# Altium PCB KillAutoSystemPCB.PcbDoc
Units mil, origin at the board's own origin, x right, y up, seen from the top; angles counter-clockwise.
Board outline 1675 x 2590 mil, 2 copper layers (Top Layer, Bottom Layer); 20 components, 15 nets, 82 pads, 2 vias.
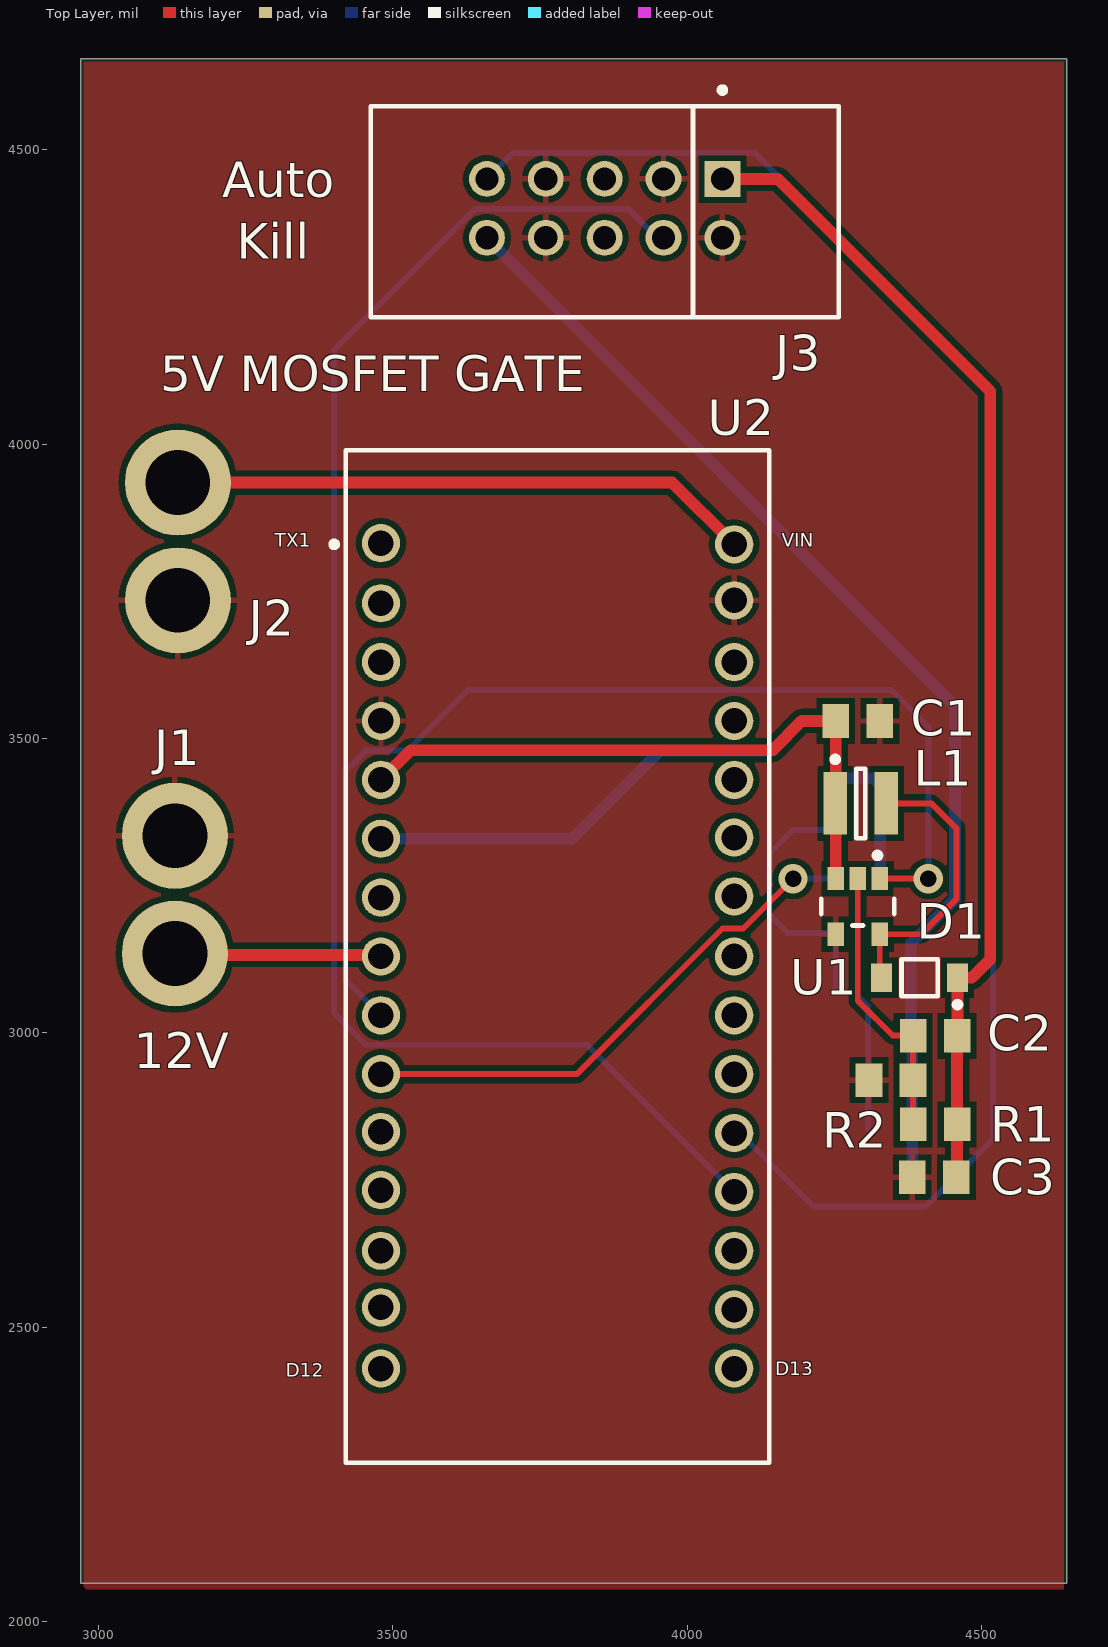
[diagram p0: Top Layer view]
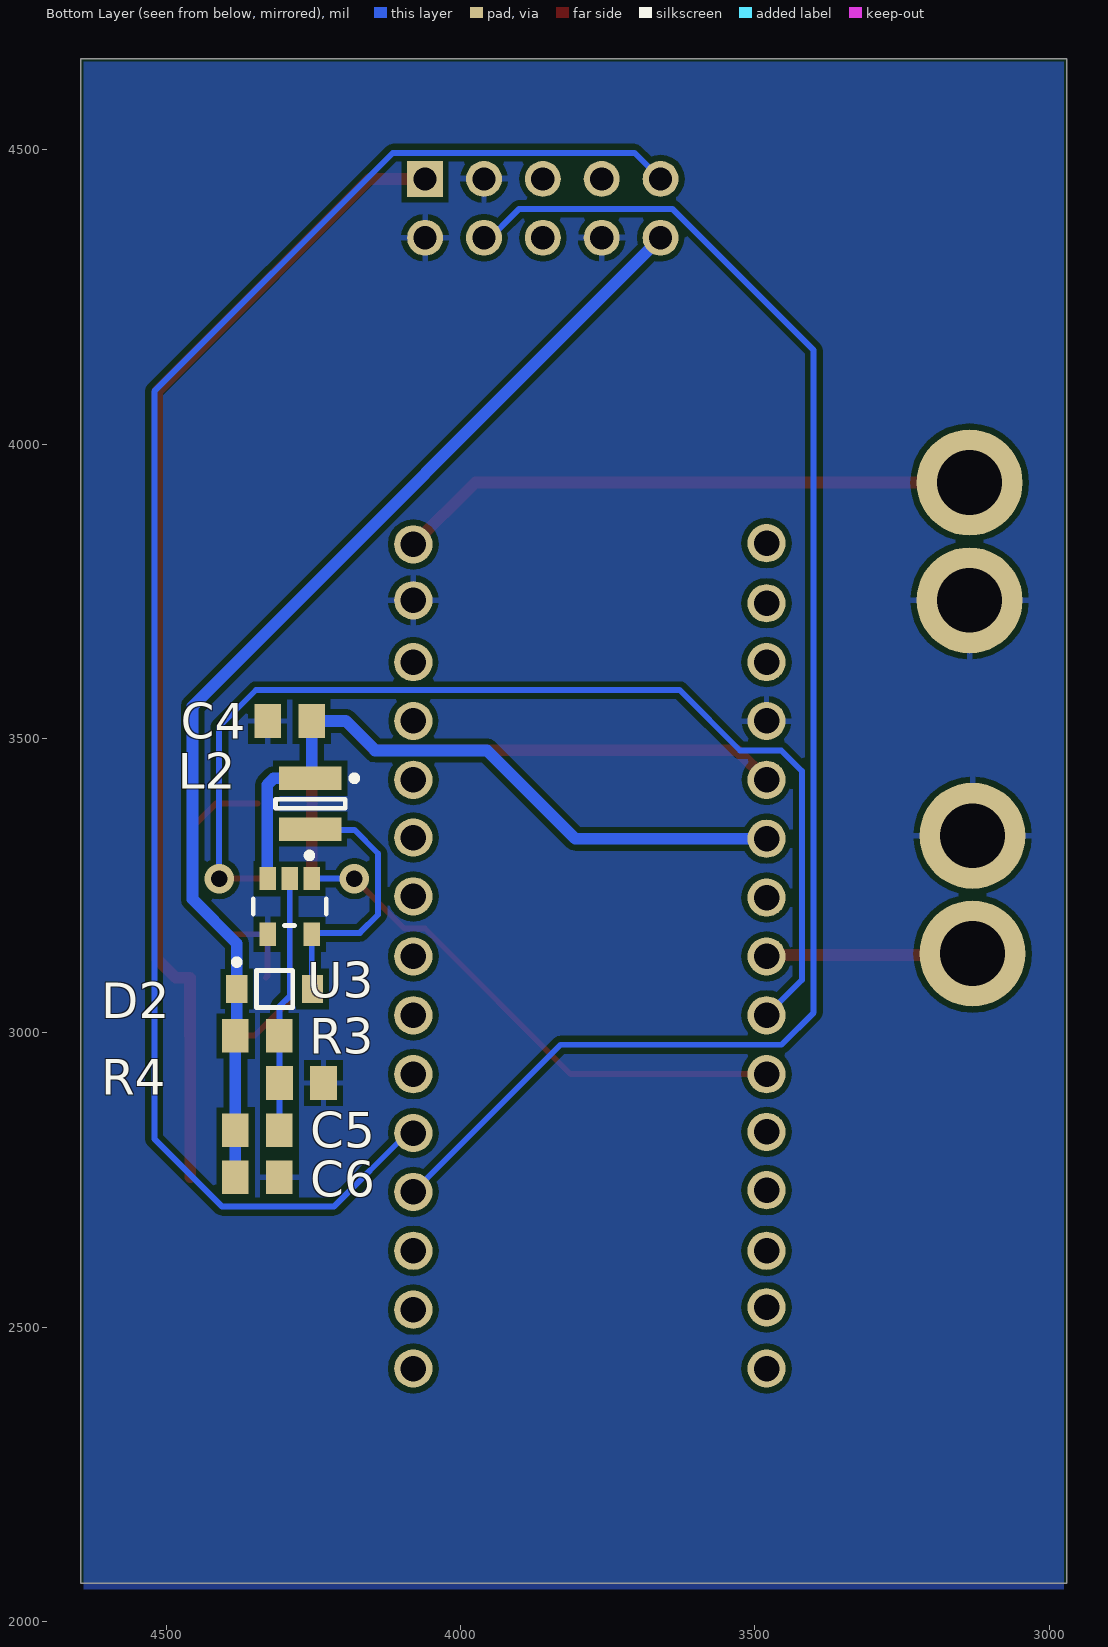
[diagram p1: Bottom Layer view, seen from below]
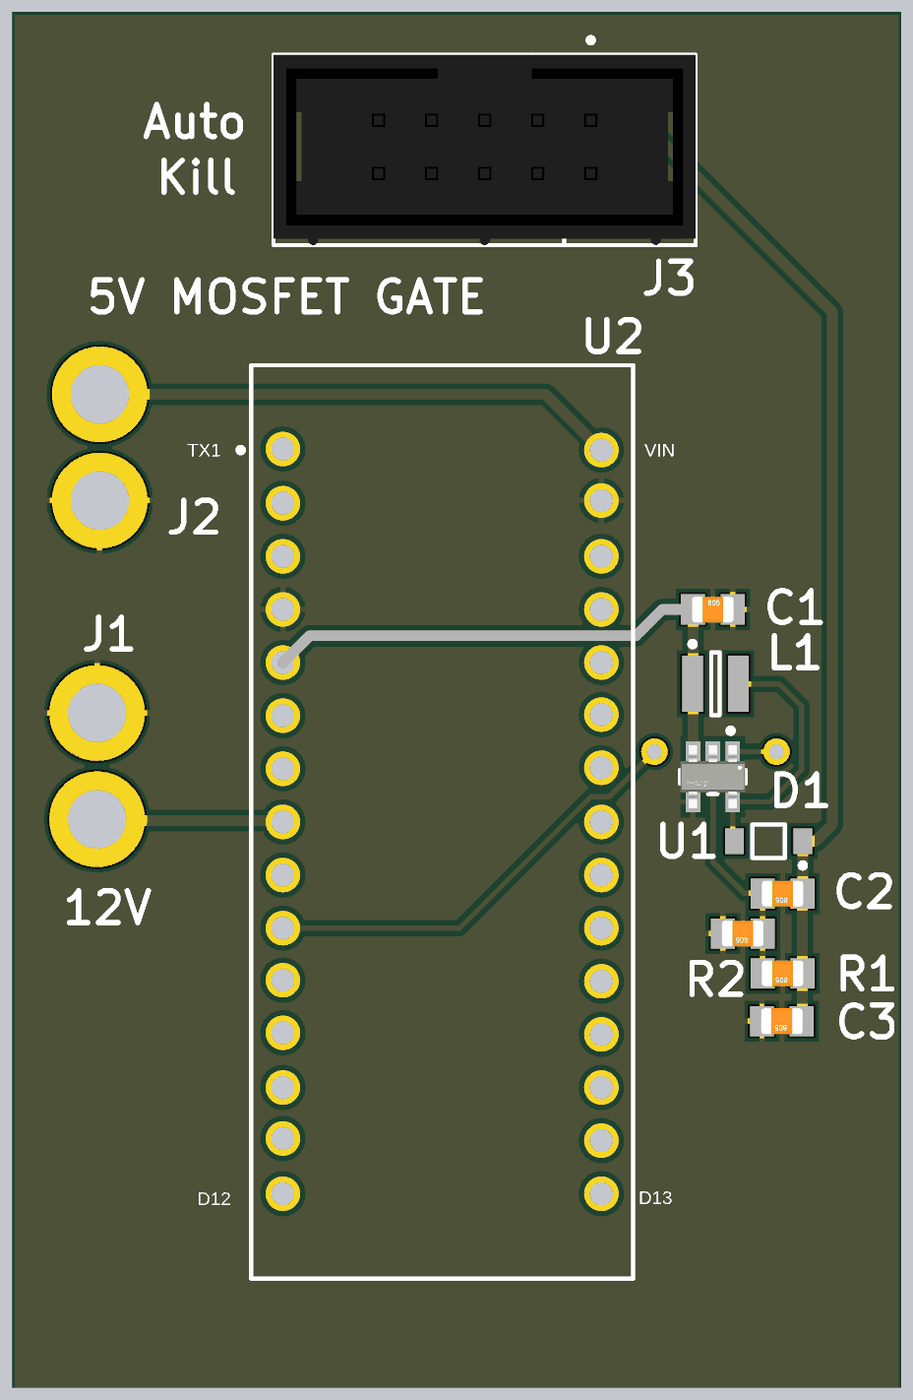
[diagram p2: 3D render of the assembled board from above, using the file's embedded part models]
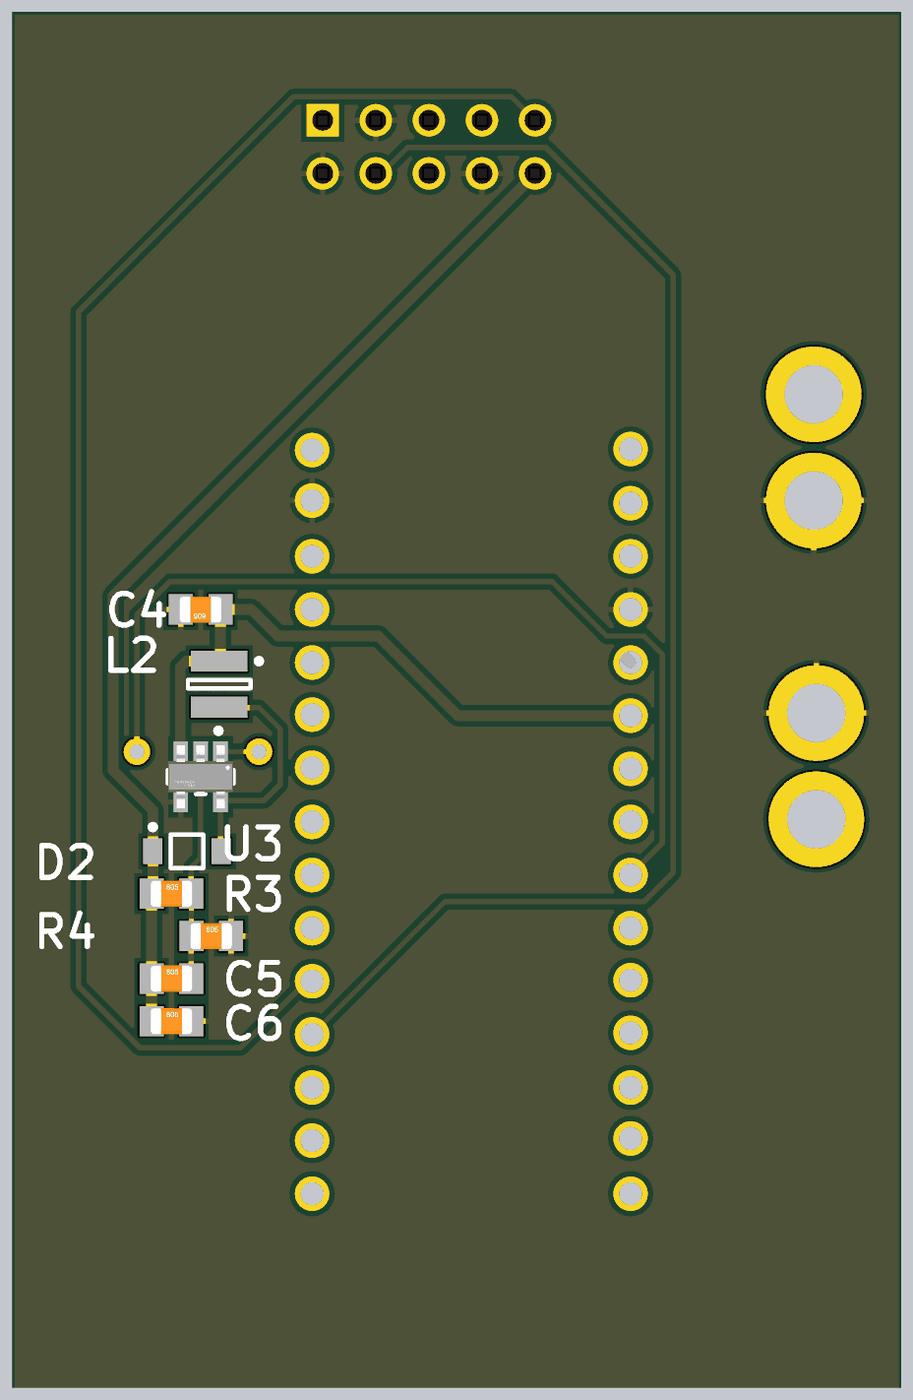
[diagram p3: 3D render of the assembled board from below, using the file's embedded part models]

## Layer stack, top to bottom
Top Solder: solder mask 0.4, Solder Resist, Dk 3.5
Top Layer: signal copper 1.4
Dielectric 1: dielectric 12.6, FR-4, Dk 4.8
Bottom Layer: signal copper 1.4
Bottom Solder: solder mask 0.4, Solder Resist, Dk 3.5

## Board outline
2970,2065 4645,2065 4645,4655 2970,4655

## Design rules (kind name [scope] priority, off if disabled: settings)
Clearance [All] p1: gap=10 ignorepadtopadclearanceinfootprint=FALSE except(0: Arc-Hole Track-Hole SMDPad-Hole THPad-Hole Via-Hole Fill-Hole Poly-Hole Region-Hole Text-Hole; 5: Arc-THPad Track-THPad; 8: SMDPad-SMDPad)
PolygonConnect [All] p1: connectstyle=Relief reliefconductorwidth=10 reliefentries=4 polygonreliefangle="90 Angle" airgapwidth=10
RoutingVias [All] p1: holewidth=28 width=50 viastyle="Through Hole" minholewidth=28 minwidth=50 maxholewidth=28 maxwidth=50
SolderMaskExpansion [All] p1: expansion=4
Width [All] p1: maxlimit=30 minlimit=10 preferedwidth=10
30 further rules are at their usual default settings.

## Components (designator, comment, footprint, x,y, rotation, side; value= is the part's Value field where it differs from the comment)
C1 "Ceramic Capacitor" "Component 0805" 4290,3530 r0 top
C2 "Ceramic Capacitor" "Component 0805" 4421.37,2995 r180 top
C3 "Ceramic Capacitor" "Component 0805" 4420,2755 r180 top
C4 "Ceramic Capacitor" "Component 0805" 4290,3530 r0 bottom
C5 "Ceramic Capacitor" "Component 0805" 4345,2835 r180 bottom
C6 "Ceramic Capacitor" "Component 0805" 4345,2755 r180 bottom
D1 "MBR0520LT1" ONSC-SOD-123-2-425-04_V 4395,3093.77 r180 top
D2 "MBR0520LT1" ONSC-SOD-123-2-425-04_V 4315.63,3074.68 r180 bottom
J1 "XT30" "Connector, XT30" 3130,3135 r180 top
J2 "XT30" "Connector, XT30" 3135,3935 r0 top
J3 "Conn_Sullins_Headers_SBH11-PBPC-D05-ST-BK_eec" Sullins_Headers_SBH11-PBPC-D05-ST-BK_0 3860,4395 r270 top
L1 "SRN3015-470M" BOUR-SRN3015-2_V 4295,3390 r0 top
L2 "SRN3015-470M" BOUR-SRN3015-2_V 4255,3389.38 r270 bottom
R1 "Resistor" "Component 0805" 4421.37,2844.81 r180 top
R2 "Resistor" "Component 0805" 4346.37,2919.9 r180 top
R3 "Resistor" "Component 0805" 4345,2995 r180 bottom
R4 "Resistor" "Component 0805" 4270,2915 r180 bottom
U1 "NCP1403SNT1G" ON_Semi_483_0 4290,3215 r180 top
U2 "Arduino_Nano_3.0" Arduino_Arduino_Nano_3.0_0 3780,3130 r0 top
U3 "NCP1403SNT1G" ON_Semi_483_0 4290,3215 r0 bottom

## Footprints (in the part's own frame and the unit in brackets; to place one, negate y for a bottom-side part, rotate by r counter-clockwise, add the part's x,y. Pads: shape width x height; smd on the part's side, far side on the other; paste and mask are expansions set on the pad)
Arduino_Arduino_Nano_3.0_0 [mm]
  round 1.65 hole 1.1 paste-1000 mask+0: 1(-7.62,17.831) 2(-7.62,15.24) 3(-7.62,12.7) 4(-7.62,10.16) 5(-7.62,7.62) 6(-7.62,5.08) 7(-7.62,2.54) 8(-7.62,0) 9(-7.62,-2.54) 10(-7.62,-5.08) 11(-7.62,-7.569) 12(-7.62,-10.085) 13(-7.62,-12.7) 14(-7.62,-15.138) 15(-7.62,-17.78) 16(7.62,-17.78) 17(7.62,-15.24) 18(7.62,-12.7) 19(7.62,-10.16) 20(7.62,-7.62) 21(7.62,-5.08) 22(7.62,-2.54) 23(7.62,0) 24(7.62,2.591) 25(7.62,5.131) 26(7.62,7.62) 27(7.62,10.16) 28(7.62,12.7) 29(7.62,15.367) 30(7.62,17.78)
  silkscreen extent -9.76,-21.84 9.14,21.84
BOUR-SRN3015-2_V [mm] "SMD, 2-Leads, Body 3x3mm, Height 1.5mm"
  rect 1x2.7 smd: 1(-1.1,0) 2(1.1,0)
  silkscreen extent -1.22,-1.5 0.2,2.02, body extent -1.5,-1.5 1.5,1.5, height 1.5
"Component 0805" [mm] "Chip Capacitor; Body 2.0 x 1.2 mm (LxW typ)"
  rect 1.15x1.45 smd: 1(-0.95,0) 2(0.95,0)
  body extent -1,-0.62 1,0.63, height 0.78
"Connector, XT30" [mil]
  round 180 hole 110: 1(0,0) 2(0,-200)
ON_Semi_483_0 [mm]
  rect 0.7x1 smd paste+0 mask+0: 1(-0.95,-1.2) 2(0,-1.2) 3(0.95,-1.2) 4(0.95,1.2) 5(-0.95,1.2)
  silkscreen extent -1.58,-2.32 1.58,0.82, body extent -1.83,-1.8 1.83,1.8, height 0.25
ONSC-SOD-123-2-425-04_V [mm] "SOD, 2-Leads, Body 2.69x1.6mm"
  rect 0.91x1.22 smd: 1(-1.635,0) 2(1.635,0)
  silkscreen extent -1.76,-0.8 0.78,1.28, body extent -1.35,-0.8 1.35,0.8, height 1.35
Sullins_Headers_SBH11-PBPC-D05-ST-BK_0 [mm]
  rect 1.55x1.55 hole 1 paste-1000 mask+0: 1(-1.42,5.08)
  round 1.55 hole 1 paste-1000 mask+0: 2(1.12,5.08) 3(-1.42,2.54) 4(1.12,2.54) 5(-1.42,0) 6(1.12,0) 7(-1.42,-2.54) 8(1.12,-2.54) 9(-1.42,-5.08) 10(1.12,-5.08)
  silkscreen extent -5.38,-10.1 4.55,10.1, body extent -4.8,-10.3 4.8,10.3, height 0.25

## Part data
C1 C4: library part "Capacitor, Ceramic", "*", Capacitance=10uF, Tolerance=10%, Voltage=50V
C2 C5: library part "Capacitor, Ceramic", "*", Capacitance=2000pF, Tolerance=10%, Voltage=50V
C3 C6: library part "Capacitor, Ceramic", "*", Capacitance=33uF, Tolerance=10%, Voltage=50V
D1 D2: "Schottky Power Rectifier, 2-Pin SOD-123, Tape and Reel", Manufacturer="On Semiconductor", ComponentLink1Description="Manufacturer URL", ComponentLink1URL=http://www.onsemi.com/, ComponentLink2Description=Datasheet, ComponentLink2URL=http://www.onsemi.cn/pub_link/Collateral/MBR0520LT1-D.PDF, ComponentLink3Description="Package Specification", ComponentLink3URL=http://www.onsemi.com/pub_link/Collateral/425-04.PDF, Configuration=Single, DatasheetVersion="Rev. 6", IFSM Max (A)=5.5, Mounting Technology="Surface Mount", PackageDescription="2-Pin SOD, Body 1.6 x 2.69 mm", PackageReference=SOD-123-2-425-04, PackageVersion="Rev. G, 10/2009", Packing="Tape and Reel", PartNumber=MBR0520LT1, RoHS=FALSE
J1 J2: library part "Connector, XT30"
J3: "CONN 10 Positions Header Connector 0.100\" (2.54mm) Through Hole Gold", Current Rating="3 Amps", Dielectric Withstanding="1000 VAC", Digikey Part Number=S9169-ND, Insulation Resistance="5000 Megohms Min.", Manufacturer="Sullins Headers", Package=HDR10, Part Number=SBH11-PBPC-D05-ST-BK, Temperature="-40°C to +105°C", Temperature Range High=+105°C, Temperature Range Low=-40°C, ComponentLink1Description=Upverter, ComponentLink1URL=https://upverter.com/upn/revision/2cdea3ecd1cfac0f/, ComponentLink2Description=Datasheet, ComponentLink2URL=https://drawings-pdf.s3.amazonaws.com/11091.pdf, Digikey Description="CONN 10 Positions Header Connector 0.100\" (2.54mm) Through Hole Gold", helpURL=https://upverter.com/upn/revision/2cdea3ecd1cfac0f/, Lead Free=yes, Num Pins=10, RoHS=TRUE, Supplier 1=Digi-Key, Supplier 2=Mouser, Supplier Part Number 1=S9169-ND, Symbol 0 0=Standard, Type="integrated circuit"
L1 L2: "Semi-shielded Power Inductor, 47 uH, +/- 20%, 0.4 A, -40 to 125 degC, 3 x 3 x 1.5 mm SMD, RoHS and Halogen Free, Tape and Reel", Inductance="47 uH", Inductance tolerance="+/- 20%", Manufacturer=Bourns, Operating Temperature="-40 to 125 degC", Rated current="0.4 A", Resistance to Solder Heat="+260 degC for 10 sec.", ComponentLink1Description="Manufacturer URL", ComponentLink1URL=http://www.bourns.com/, ComponentLink2Description=Datasheet, ComponentLink2URL=http://www.bourns.com/data/global/pdfs/SRN3015.pdf, ComponentLink3Description="Package Specification", ComponentLink3URL=http://www.bourns.com/data/global/pdfs/SRN3015.pdf, DatasheetVersion=Aug-11, DCR Max="1.406 Ohm", Isat="0.38 A", Mounting Technology="Surface Mount", PackageDescription="2-Pin SMD, Body 3 x 3 mm, Height 1.5 mm", PackageReference=SRN3015, Packing="Tape and Reel", PartNumber=SRN3015-470M, RoHS=TRUE, SRF Min="18 MHz"
R1 R3: "Thick Film Resistors - SMD 1/16watt 1%", Power=1/8W, Resistance=568, Tolerance=1%
R2 R4: "Thick Film Resistors - SMD 1/16watt 1%", Power=1/8W, Resistance=32, Tolerance=1%
U1 U3: "Boost Converter"

## Via types
v1: diameter 50, hole 28, Top Layer to Bottom Layer, 2 vias

## Nets (pads, with @x,y where several pads share a name; then routed paths per layer and width w, separated by ;. In a path a pad name is that pad's centre, name@x,y a point inside that pad or via, vN(x,y) a via of type N, cw(c..) or ccw(c..) an arc to the next point about the centre after c; other vN are vias at no path point)
"5V MOSFET GATE": J2.1 U2.30 | length 988.5
  Top Layer w20: J2.1 3975,3935 U2.30
"12 V": J1.1 U2.8 | length 345
  Top Layer w20: J1.1@3132.5,3132.5 U2.8@3477.5,3132.5
A0: J3.4 U2.19 | length 2626.8
  Bottom Layer w10: J3.4 3960,4340 3900,4400 3640,4400 3400,4160 3400,3034.48 3454.48,2980 3830,2980 U2.19
A1: J3.9 U2.20 | length 2855.3
  Bottom Layer w10: J3.9 3704.09,4495 4115,4495 4520,4090 4520,2820.2 4404.8,2705 4215,2705 4090,2830 U2.20
"AUTO 15V": C2.1 C3.1 D1.1 J3.1 R1.1 | length 1977.1
  Top Layer w10: C2.1 C2.1@4459.37,2995.6
  Top Layer w20: J3.1 4154.09,4450.91 4515,4090 4515,3125 4483.77,3093.77 D1.1 C2.1@4459.37,2995.6 ; C3.1@4458.77,2755 R1.1 C2.1
"CE GREEN": U2.10 U3.1 | length 910.2
  Top Layer w10: U2.10 3812.85,2930 4060.33,3177.48 4095.24,3177.48 v1(4180,3262.24)
  Bottom Layer w10: v1(4180,3262.24) U3.1
"CE RED": U1.1 U2.9 | length 1872.8
  Top Layer w10: U2.9 3485,3030 3490,3035 U2.9@3490,3040 ; U1.1 v1(4410,3262.24)
  Bottom Layer w10: U2.9 3420,3090 3420,3445 3455,3480 3525,3480 3627.52,3582.52 4347.28,3582.52 4410,3519.8 v1(4410,3262.24) v1@4412.76,3262.24
D2: C1.1 L1.1 U1.3 U2.5 | length 1086.7
  Top Layer w10: L1.1@4252.6,3384.09 4246.69,3390 L1.1@4252.6,3395.91
  Top Layer w20: U2.5 3530.47,3480.47 4145.47,3480.47 4195,3530 C1.1 L1.1@4252.6,3395.91 ; U1.3 L1.1@4252.6,3384.09
D3: C4.1 L2.1 U2.6 U3.3 | length 1185
  Bottom Layer w10: L2.1@4252.6,3435.09 L2.1 L2.1@4257.69,3430
  Bottom Layer w20: U2.6 3805,3330 3955,3480 4145,3480 4195,3530 C4.1 L2.1@4252.6,3435.09 ; L2.1 4317.31,3432.69 4328.19,3421.81 U3.3@4328.19,3272.1
"FB GREEN": C5.2 R3.2 R4.1 U3.2 | length 434.7
  Bottom Layer w10: U3.2 4290,3062.6 4307.6,3045 R3.2 4307.4,2994.8 R4.1 4307.6,2914.8 C5.2
"FB RED": C2.2 R1.2 R2.1 U1.2 | length 476.4
  Top Layer w10: U1.2 4290,3055 4349.4,2995.6 4383.37,2995.6 C2.2 4383.97,2920.1 R2.1 4383.97,2919.71 R1.2
GND: C1.2 C3.2 C4.2 C6.2 J1.2 J2.2 J3.2 J3.3 J3.7 J3.8 R2.2 R4.2 U1.4 U2.4 U2.29 U3.4
"KILL 15V": C5.1 C6.1 D2.1 J3.10 R3.1 | length 1959.9
  Bottom Layer w10: R3.1@4380,2997.4 R3.1
  Bottom Layer w20: J3.10@3664.55,4355.45 3664.55,4345.45 4455,3555 4455,3227 4380,3152 D2.1 R3.1@4380,2997.4 ; C6.1 C5.1 R3.1
"LX GREEN": D2.2 L2.2 U3.5 | length 456.1
  Bottom Layer w10: D2.2 4252.6,3076.01 U3.5 4250.35,3170 4170.86,3170 4140,3200.86 4140,3305 4180,3345 4251.26,3345 4252.33,3346.07 L2.2
"LX RED": D1.2 L1.2 U1.5 | length 480.2
  Top Layer w10: D1.2 4327.4,3097 U1.5 4397.76,3167.76 4457.4,3227.4 4457.4,3347.6 4415,3390 L1.2@4345,3390
pads on no net: J3.5 J3.6 U2.1 U2.2 U2.3 U2.7 U2.11 U2.12 U2.13 U2.14 U2.15 U2.16 U2.17 U2.18 U2.21 U2.22 U2.23 U2.24 U2.25 U2.26 U2.27 U2.28

## Polygon pours and split planes (outlines as drawn)
GND on Top Layer "Top Layer-GND" (solid, pour order 2): 2975,4650 2975,2060 2980,2055 4640,2055 4640,4650
no net on Top Layer "Top Layer-No Net" (solid, pour order 0): 4725,4690
GND on Bottom Layer "Bottom Layer-GND" (solid, pour order 4): 2975,4650 4640,4650 4640,2055 2975,2055

## Silkscreen, mask and mechanical layers (free items; w line width, h text height)
Top Overlay:
  text "Auto" at 3210,4420 h60
  text "Kill" at 3235,4315 h60
  text "5V MOSFET GATE" at 3105,4090 h60
  text "12V" at 3060,2940 h60

## Text inside footprints (layer, text, board x,y; h text height)
U2: Top Overlay "TX1" at 3299.68,3817.99 h39.37; Top Overlay "VIN" at 4160.91,3817.99 h39.37; Top Overlay "D12" at 3318.39,2408.54 h39.37; Top Overlay "D13" at 4150.08,2410.51 h39.37